# Altium PCB Flash Strobe Board with IGBTs.PcbDoc
Units mil, origin at the board's own origin, x right, y up, seen from the top; angles counter-clockwise.
Board outline 2964.62 x 3200.85 mil, 2 copper layers (Top Layer, Bottom Layer); 44 components, 17 nets, 88 pads, 0 vias.
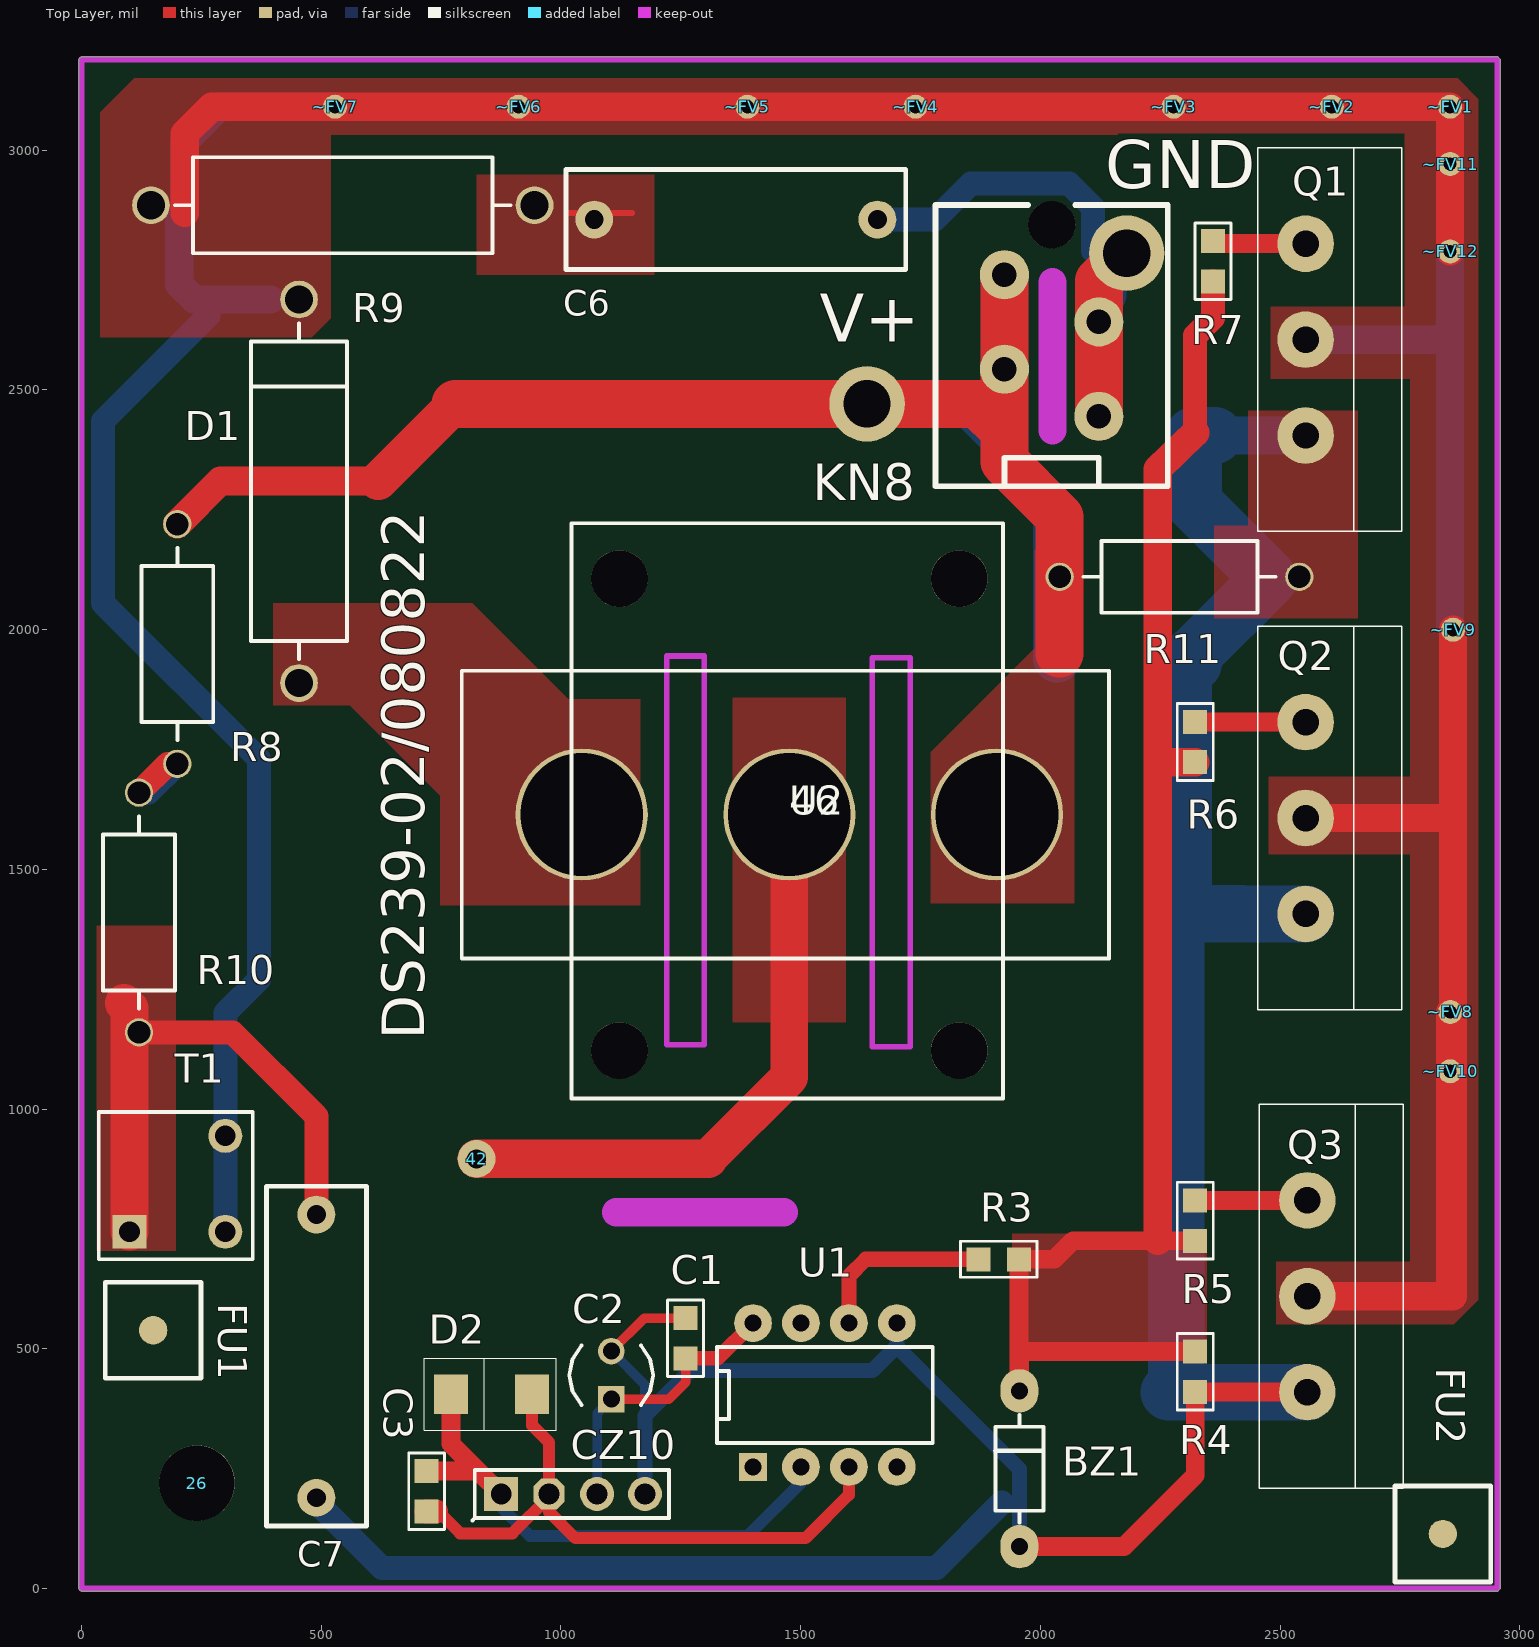
[diagram p0: Top Layer view]
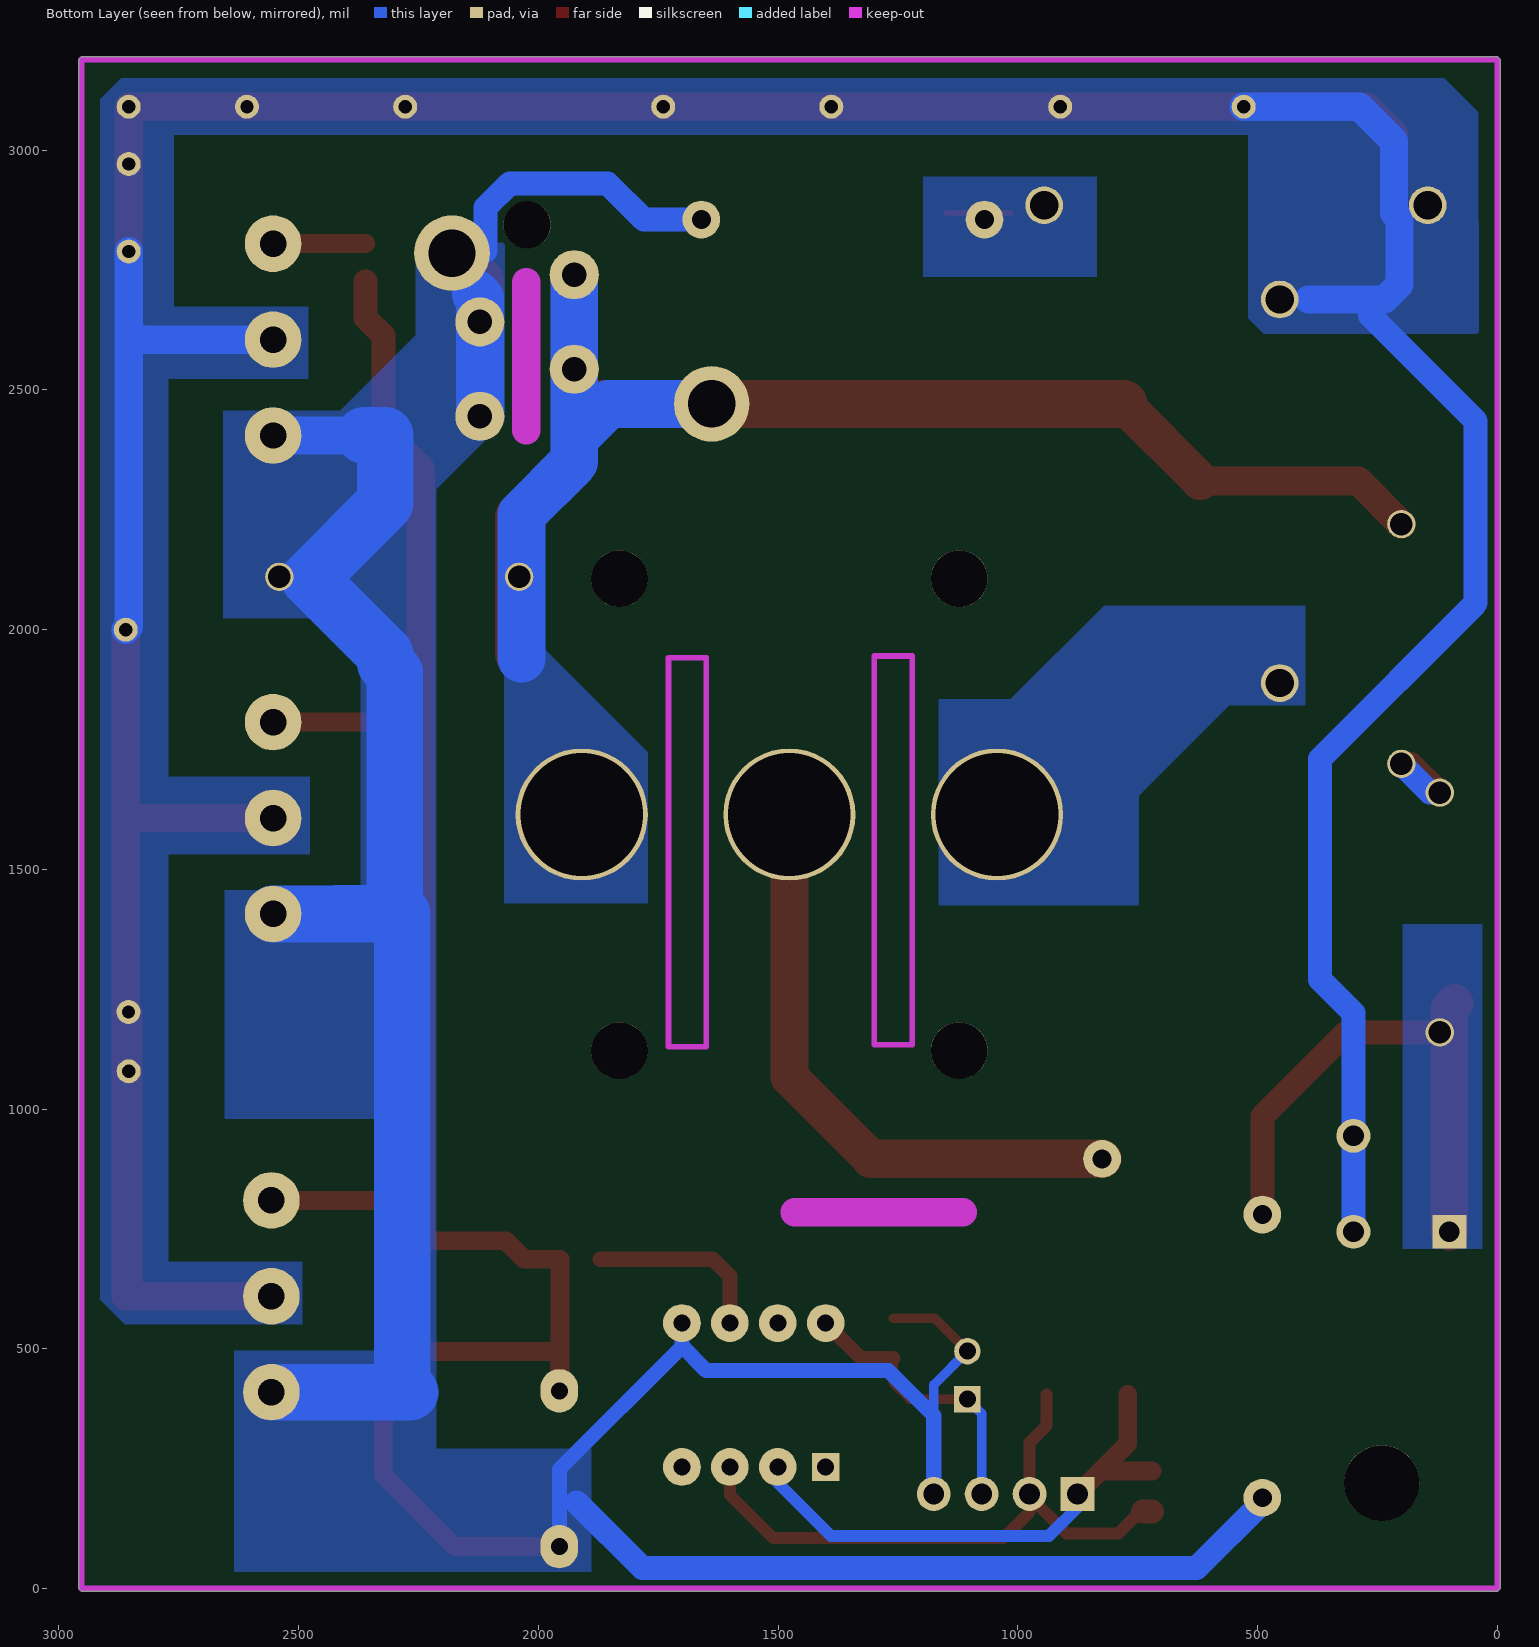
[diagram p1: Bottom Layer view, seen from below]

## Layer stack, top to bottom
Top Solder: solder mask 0.4, Solder Resist, Dk 3.5
Top Layer: signal copper 1.4
Dielectric 1: dielectric 12.6, FR-4, Dk 4.8
Bottom Layer: signal copper 1.4
Bottom Solder: solder mask 0.4, Solder Resist, Dk 3.5

## Board outline
-5.91,0 0,-5.91 2952.81,-5.91 2958.72,0 2958.72,3189.04 2952.81,3194.94 0,3194.94 -5.91,3189.04

## Design rules (kind name [scope] priority, off if disabled: settings)
Clearance Clearance_2 [OnLayer('Bottom Layer') And (IsThruPin Or IsSMTPin Or IsWire) vs OnLayer('Bottom Layer') And (IsThruPin Or IsSMTPin Or IsWire Or IsVia)] p1: gap=11.81 ignorepadtopadclearanceinfootprint=FALSE
Clearance Clearance_1 [OnLayer('Top Layer') And (IsThruPin Or IsSMTPin Or IsWire Or IsVia) vs OnLayer('Top Layer') And (IsThruPin Or IsSMTPin Or IsWire Or IsVia)] p2: gap=11.81 ignorepadtopadclearanceinfootprint=FALSE
Clearance [All] p3: gap=12 ignorepadtopadclearanceinfootprint=FALSE
ComponentClearance [All] p1: gap=0 collisioncheckmode=3 verticalgap=0 showdistances=FALSE
PlaneConnect [All] p1: planeconnectstyle=Relief reliefexpansion=25 reliefentries=4 reliefconductorwidth=12 reliefairgap=10
PolygonConnect [All] p1: connectstyle=Direct reliefconductorwidth=10 reliefentries=4 polygonreliefangle="90 Angle" airgapwidth=10
RoutingVias [All] p1: holewidth=28 width=50 viastyle="Through Hole" minholewidth=28 minwidth=50 maxholewidth=28 maxwidth=50
SolderMaskExpansion [All] p1: expansion=0
Width Net_Width_1 [InNet('NET_16')] p1: maxlimit=0.12 minlimit=0.12 preferedwidth=0.12
Width [All] p2: maxlimit=150 minlimit=12 preferedwidth=12
28 further rules are at their usual default settings.

## Components (designator, comment, footprint, x,y, rotation, side; value= is the part's Value field where it differs from the comment)
26 "" POINT_1 240.99,220.12 r0 top
42 "" VIA_REV1 824.13,896.19 r0 top
46 "" FLASH_SCREW_REV1 1476.38,1613.99 r90 top
BZ1 "1N5249B" BZ19_2 1956.17,87.43 r90 top
C1 "100nF" SMD_C_0805_TOP 1260,480 r90 top
C2 "10uF 25V" 10U_25V 1105,395 r90 top
C3 "100nF" SMD_C_0805_TOP 720,245 r270 top
C6 "47nF X2" "CFR F15 L18 B5.3 H11_Primary" 1660,2855 r180 top
C7 "47nF X2" "CFR F15 L18 B5.3 H11_Primary" 490,780 r270 top
CZ10 "HEADER 4" CONNECTOR_4PINS 875.32,197.28 r0 top
D1 "6A10" 6ADIODE 453.77,1888.44 r90 top
D2 "SMAJ20A" 6JG1_2 940,405 r180 top
FU1 "" FIDUCIAL_TOP 149.64,538.75 r270 top
FU2 "" FIDUCIAL_TOP 2839.34,113.89 r90 top
GND "CONN" POWER_INPUT 2180,2785 r0 top
KN8 "91999_0454" 91999_2_91999_0454(Primary) 1925,2740 r0 top
Q1 "G160N60" G160N60 2553.09,2804.7 r270 top
Q2 "G160N60" G160N60 2553.09,1806.93 r270 top
Q3 "G160N60" G160N60 2556.63,809.57 r270 top
R3 "20ohm" SMD_R_0805_TOP 1871.12,686.72 r0 top
R4 "10kohm" SMD_R_0805_TOP 2322.83,410.3 r90 top
R5 "51ohm" SMD_R_0805_TOP 2322.83,725.3 r90 top
R6 "51ohm" SMD_R_0805_TOP 2322.83,1723.46 r90 top
R7 "51ohm" SMD_R_0805_TOP 2360,2726 r90 top
R8 "0.5W 1Mohm" 0.5W 200,1720 r90 top
R9 "2W 15ohm" 2W 145,2885 r0 top
R10 "0.5W 2.2Mohm" 0.5W 120,1660 r270 top
R11 "0.5W 1Mohm" 0.5W 2540,2110 r180 top
T1 "PFT-1052V" TRIGER_REV2 100.01,944.16 r0 top
U1 "TLP350" TLP350 1400.58,253.59 r0 top
U2 "FLASH LAMP" FLASHER_2_REV1 1476.38,1614.17 r0 top
V+ "CONN" POWER_INPUT 1638.41,2470.8 r0 top
~FV1 "VIA1" VIA1 2854.33,3090.55 r0 top
~FV2 "VIA1" VIA1 2607.63,3090.55 r0 top
~FV3 "VIA1" VIA1 2277.63,3090.55 r0 top
~FV4 "VIA1" VIA1 1739.5,3090.55 r0 top
~FV5 "VIA1" VIA1 1389.01,3090.55 r0 top
~FV6 "VIA1" VIA1 911.5,3090.55 r0 top
~FV7 "VIA1" VIA1 528.88,3090.55 r0 top
~FV8 "VIA1" VIA1 2854.63,1202.5 r0 top
~FV9 "VIA1" VIA1 2860.5,1999.76 r0 top
~FV10 "VIA1" VIA1 2854.33,1078.73 r0 top
~FV11 "VIA1" VIA1 2854.33,2970.88 r0 top
~FV12 "VIA1" VIA1 2854.33,2788.76 r0 top

## Footprints (in the part's own frame and the unit in brackets; to place one, negate y for a bottom-side part, rotate by r counter-clockwise, add the part's x,y. Pads: shape width x height; smd on the part's side, far side on the other; paste and mask are expansions set on the pad)
0.5W [mm]
  round 1.499 / inner round 1.524 / far side round 1.499 hole 1.2: 1(0,0) 2(12.7,0)
  silkscreen extent 1.27,-1.91 11.43,1.91
2W [mm]
  round 2 / inner round 1.524 / far side round 2 hole 1.5: 1(0,0) 2(20.32,0)
  silkscreen extent 1.27,-2.54 19.05,2.54
6ADIODE [mm]
  round 2 / inner round 1.524 / far side round 2 hole 1.5: 1(0,0) 2(20.32,0)
  silkscreen extent 1.27,-2.54 19.05,2.54
6JG1_2 [mm]
  rect 1.8x2.1 smd: 1(0,0) 2(4.3,0)
  silkscreen extent -1.27,-1.91 5.71,1.91
10U_25V [mil]
  rect 55.1x55.1 / inner round 60 / far side rect 55.1x55.1 hole 35.4: 1(0,0)
  round 55.1 / inner round 60 / far side round 55.1 hole 35.4: 2(100,0)
  silkscreen extent -12,-88 112,88
91999_2_91999_0454(Primary) [mm]
  round 2.5 hole 2.5: 5(2.5,2.65)
  round 2.6 hole 1.3: a1(0,0) a2(5,-2.5) b1(0,-5) b2(5,-7.5)
  silkscreen extent -3.65,-11.2 8.65,3.7
BZ19_2 [mil]
  oval 90.53x78.73 / inner round 60 / far side oval 90.53x78.73 hole 35.4 mask-26.73: 1(0,0) 2(325,0)
  silkscreen extent 50,-50 275,50
"CFR F15 L18 B5.3 H11_Primary" [mm]
  round 2 hole 1: 1(0,0) 2(15,0)
  silkscreen extent -1.5,-2.65 16.5,2.65
CONNECTOR_4PINS [mm]
  rect 1.799x1.799 / inner round 1.524 / far side rect 1.799x1.799 hole 1.1: 1(0,0)
  oct 1.651x1.651 / inner round 1.524 / far side round 1.799 hole 1.1: 2(2.54,0)
  round 1.799 hole 1.1: 3(5.08,0)
  round 1.799 / inner round 1.524 / far side round 1.799 hole 1.1: 4(7.62,0)
  silkscreen extent -1.52,-1.4 8.89,1.27
FIDUCIAL_TOP [mil]
  round 59.03 smd: 1(0,0)
  silkscreen extent -100,-100 100,100
FLASH_SCREW_REV1 [mm]
  round 3 / inner round 1.524 / far side round 3 hole 3 mask+0: 1(-12.5,9) 2(12.5,9) 3(-12.5,-9) 4(12.5,-9)
  silkscreen extent -15.04,-11.32 15.44,11.54
FLASHER_2_REV1 [mm]
  round 7 / inner round 1.524 / far side round 7 hole 6.5: 1(-11,0) 2(10.999,0) 3(0,0)
  silkscreen extent -17.35,-7.62 16.94,7.62
G160N60 [mm]
  round 3 / inner round 1.524 / far side round 3 hole 1.4: 1(0,0) 2(5.08,0) 3(10.16,0)
  silkscreen extent -5.08,-2.54 15.24,5.08
POINT_1 [mil]
  round 157.47 / inner round 60 / far side round 157.47 hole 157.47 mask-157.47: 1(0,0)
POWER_INPUT [mm]
  round 4 / inner round 1.524 / far side round 4 hole 2.5: 1(0,0)
SMD_C_0805_TOP [mil]
  rect 50x50 smd: 1(0,0) 2(84,0)
  silkscreen extent -38,-38 122,38
SMD_R_0805_TOP [mil]
  rect 50x50 smd: 1(0,0) 2(84,0)
  silkscreen extent -38,-38 122,38
TLP350 [mil]
  rect 58x58 / inner round 60 / far side rect 58x58 hole 35.4: 1(0,0)
  round 78.73 / inner round 60 / far side round 78.73 hole 35.4: 2(100,0) 3(200,0) 4(300,0) 5(300,300) 6(200,300) 7(100,300) 8(0,300)
  silkscreen extent -75,50 375,250
TRIGER_REV2 [mm]
  rect 1.799x1.799 / inner round 1.524 / far side rect 1.799x1.799 hole 1.1: 1(0,-5.08)
  round 1.799 / inner round 1.524 / far side round 1.799 hole 1.1: 2(5.08,0) 3(5.08,-5.08)
  silkscreen extent -1.62,-6.54 6.53,1.27
VIA1 [mm]
  round 1.27 / inner round 1.524 / far side round 1.27 hole 0.7 mask+0.127: FV(0,0)
VIA_REV1 [mm]
  round 2 / inner round 1.524 / far side round 2 hole 1: 3(0,0)

## Part data
C6 C7: "Capacitor"
KN8: "PIN HEADER 5mm 2'LI DIK 16A 91999_0454"

## Nets (pads, with @x,y where several pads share a name; then routed paths per layer and width w, separated by ;. In a path a pad name is that pad's centre, name@x,y a point inside that pad or via, vN(x,y) a via of type N, cw(c..) or ccw(c..) an arc to the next point about the centre after c; other vN are vias at no path point)
0: BZ1.1 C1.2 C2.2 C6.1 C7.2 CZ10.4 GND.1 KN8.a2 KN8.b2 Q1.3 Q2.3 Q3.3 R4.1 R11.1 U1.5 | length 8448.3
  Top Layer w20: C2.2 1174,564 C1.2
  Top Layer w39.37: BZ1.1 2174.03,87.43 2322.83,236.24 R4.1 2555.9,410.3 Q3.3
  Top Layer w100: KN8.b2 KN8.a2 2121.85,2726.85 GND.1
  Bottom Layer w20: C2.2 1175.32,424.68 1175.32,360.32
  Bottom Layer w31.5: CZ10.4 1175.32,360.32 1270,455 1650,455 1700.58,505.58 ; U1.5 1700.58,505.58 ; BZ1.1 1956.17,248.83 1700.58,504.42 1700.58,505.58
  Bottom Layer w50: C7.2@490,180 627.09,42.91 1782.91,42.91 1920,180 ; C6.1 1780,2855 1855.54,2930.54 2059.46,2930.54 2110,2880 GND.1@2110,2790
  Bottom Layer w78.74: 2362.98,2404.7 Q1.3
  Bottom Layer w100: KN8.b2 KN8.a2 2121.85,2691.85 2130,2700
  Bottom Layer w118.11: 2362.98,2404.7 2319.2,2404.7 2319.2,2264.47 2477.49,2106.18 2319.2,1947.9 2319.2,1929.44 2299.2,1909.43 2299.2,1409.44 Q2.3 2283.45,1406.93 2283.45,425.19 2267.58,409.57 Q3.3
+15V: C1.1 C2.1 CZ10.3 U1.8 | length 600.6
  Top Layer w20: C2.1 1225,395 1260,430 C1.1
  Top Layer w30: C1.1 1326.99,480 U1.8
  Bottom Layer w20: CZ10.3 1075.32,365.32 C2.1
N00106: D1.2 Q1.2 Q2.2 Q3.2 R9.1 T1.2 T1.3 ~FV1.FV ~FV2.FV ~FV3.FV ~FV4.FV ~FV5.FV ~FV6.FV ~FV7.FV ~FV8.FV ~FV9.FV ~FV10.FV ~FV11.FV ~FV12.FV | length 9841
  Top Layer w59.06: 215.4,2868.88 215.4,3034.27 271.67,3090.55 ~FV7.FV ~FV6.FV ~FV5.FV ~FV4.FV 2023.5,3090.55 ~FV3.FV ~FV2.FV ~FV1.FV ~FV11.FV ~FV12.FV ; Q2.2 2860.5,1606.93 ; Q3.2 2854.63,609.57 ; ~FV10.FV ~FV10.FV@2854.63,1079.03 ; ~FV8.FV ~FV10.FV@2854.63,1079.03 ; ~FV9.FV 2860.5,1606.93 ; 2854.63,609.57 ~FV10.FV@2854.63,1079.03 ; 2854.63,609.57 2860.5,609.57 2860.5,1606.93
  Bottom Layer w50: 265,2655 45,2435 45,2055 370,1730 370,1270 300.01,1200.01 T1.2 T1.3
  Bottom Layer w59.06: 393.77,2688.44 235.48,2688.44 203.98,2719.94 203.98,2857.46 215.4,2868.88 215.4,3018.57 287.38,3090.55 ~FV7.FV ; Q1.2 2833.04,2604.7 2854.33,2625.99 ; ~FV12.FV 2854.33,2625.99 ; ~FV9.FV 2854.33,2005.93 2854.33,2625.99
N00107: R8.1 R10.1 | length 209.7
  Top Layer w50: R10.1 180,1720 R8.1
  Bottom Layer w50: R10.1 140,1660 R8.1
N00521: Q1.1 R7.2 | length 193.1
  Top Layer w39.37: R7.2@2360,2804.83 Q1.1@2552.96,2804.83
  Top Layer w59.06: Q1.1@2552.96,2804.83 Q1.1
N00713: Q3.1 R5.2 | length 233.9
  Top Layer w39.37: R5.2 2323.1,809.57 Q3.1
N00766: Q2.1 R6.2 | length 230.5
  Top Layer w39.37: R6.2 2323.36,1806.93 Q2.1
N00808: BZ1.2 R3.2 R4.2 R5.1 R6.1 R7.1 | length 3217.2
  Top Layer w39.37: 2228.33,725.3 2067.81,725.3 2029.23,686.72 R3.2 1955.12,413.48 BZ1.2 1956.17,494.3 R4.2 ; 2245,725.3 R5.1
  Top Layer w50: 2322.83,2410.55 2322.83,2612.83 2360,2650 R7.1
  Top Layer w59.06: 2245,725.3 2245,1723.46 ; R6.1 2245,1723.46 ; 2322.83,2410.55 2245,2335.05 2245,1723.46
N01961: C3.1 CZ10.1 D2.2 U1.2 | length 1115.9
  Top Layer w39.37: C3.1 827.61,245 ; D2.2 770.72,301.89 827.61,245 ; CZ10.1 827.61,245
  Bottom Layer w25: CZ10.1 875.32,169.68 935,110 1390,110 1500.58,220.58 U1.2 U1.2@1500.58,254.42
N02002: C3.2 CZ10.2 D2.1 U1.3 | length 1309.6
  Top Layer w25: C3.2@739,161 744,161 790,115 898.52,115 CZ10.2@975.32,191.8 ; D2.1 940,340 975.32,304.68 CZ10.2 CZ10.2@975.32,191.8 ; U1.3 1600.58,195.58 1510,105 1030,105 975.32,159.68 CZ10.2@975.32,191.8
  Top Layer w50: C3.2 C3.2@739,161
N04820: R3.1 U1.6 | length 383.2
  Top Layer w31.5: U1.6 1600.58,651.77 1635.53,686.72 R3.1
N09329: C6.2 R9.2 | length 133.3
  Top Layer w12: 1015.4,2868.88 1148.67,2868.88
N10937: D1.1 U2.1
N13384: C7.1 R10.2 T1.1 | length 1129.5
  Top Layer w50: R10.2 315,1160 490,985 C7.1
  Top Layer w78.74: 89.4,1220.7 89,1221.1 100.01,1210.09 T1.1
N17422: 
NET_16: 42.3 U2.3 | length 1271.1
  Top Layer w78.74: 1307.08,896.19 1307.08,897.63 1476.38,1066.93 U2.3
  Top Layer w80: 42.3 1307.08,896.19
POWER_VCC_RED(V+): KN8.a1 KN8.b1 R8.2 R11.2 U2.2 V+.1 | length 3981.7
  Top Layer w12: U2.2 1984.25,1614.17 U2.2@2023.61,1653.53
  Top Layer w60: R8.2 290,2310 619.2,2310
  Top Layer w80: 619.2,2310 780,2470.8
  Top Layer w100: 780,2470.8 V+.1 1869.2,2470.8 1925,2415 ; KN8.a1 KN8.b1 1925,2415 ; 2040,1950 2040,2235 1925,2350 1925,2415
  Bottom Layer w100: V+.1 1853.93,2470.8 1925,2399.72 ; KN8.a1 KN8.b1 1925,2399.72 ; 2035,1940 2035,2240 1925,2350 1925,2399.72
pads on no net: 26.1 46.1 46.2 46.3 46.4 FU1.1 FU2.1 KN8.5 U1.1 U1.4 U1.7

## Polygon pours and split planes (outlines as drawn)
N00808 on Top Layer "283" (solid, pour order 12): 1940.93,740.15 1940.93,480.31 2346.44,480.31 2346.44,740.15
POWER_VCC_RED(V+) on Top Layer "348" (solid, pour order 19): 1988.17,2165 2070.85,2165 2070.85,1429.12 1771.64,1429.12 1771.64,1744.08 1988.17,1960.62
N13384 on Top Layer "337" (solid, pour order 16): 196.85,1078.73 196.85,704.72 31.5,704.72 31.5,1381.88 196.85,1381.88
N10937 on Top Layer "344" (solid, pour order 17): 1165.35,1425 748.03,1425 748.03,1653.53 559.05,1842.51 400,1842.51 400,2055 815.06,2055 1015.74,1854.32 1165.35,1854.32
NET_16 on Top Layer "321" (solid, pour order 14): 1358.26,1858.25 1594.48,1858.25 1594.48,1181.09 1358.26,1181.09
0 on Top Layer "289" (solid, pour order 13): 2661.4,2244.08 2661.4,2023.61 2362.19,2023.61 2362.19,2216.52 2433.05,2216.52 2433.05,2456.68 2661.4,2456.68
N09329 on Top Layer "273" (solid, pour order 11): 1195,2740 824.92,2740 824.92,2948.66 1195,2948.66
N00106 on Top Layer "326" (solid, pour order 9): 39.37,3078.72 39.37,2610 480,2610 519.68,2649.68 519.68,3031.47 1901.56,3031.47 2161.4,3031.47 2161.4,3035.41 2759.82,3035.41 2759.82,2673.21 2480.3,2673.21 2480.3,2523.6 2771.63,2523.6 2771.63,1692.9 2476.36,1692.9 2476.36,1531.48 2771.63,1531.48 2771.63,681.1 2492.11,681.1 2492.11,551.18 2862.18,551.18 2913.36,602.36 2913.36,3106.28 2870.06,3149.58 110.24,3149.58
0 on Bottom Layer "267" (solid, pour order 4): 1890,35.43 2633.84,35.43 2633.84,496.06 2334.63,496.06 2334.63,980.31 2653.52,980.31 2653.52,1456.68 2370.06,1456.68 2370.06,1976.36 2425.18,2031.48 2425.18,2023.61 2657.46,2023.61 2657.46,2456.68 2413.37,2456.68 2255.89,2614.15 2255.89,2807.07 2070,2807.07 2070,2435 2212.58,2292.42 2212.58,291.34 1890,291.34
N00106 on Bottom Layer "332" (solid, pour order 7): 39.37,3078.72 39.14,2617 487,2617 519.68,2649.68 519.68,3031.47 2165,3031.47 2759.82,3031.47 2759.82,2673.21 2480.3,2673.21 2480.3,2523.6 2771.63,2523.6 2771.63,1692.9 2476.36,1692.9 2476.36,1531.48 2771.63,1531.48 2771.63,681.1 2492.11,681.1 2492.11,551.18 2862.18,551.18 2913.36,602.36 2913.36,3106.28 2870.06,3149.58 110.24,3149.58
POWER_VCC_RED(V+) on Bottom Layer "347" (solid, pour order 8): 1988.17,2170 2070.85,2170 2070.85,1429.12 1771.64,1429.12 1771.64,1744.08 1988.17,1960.62
N09329 on Bottom Layer "314" (solid, pour order 6): 1197.2,2735.67 1197.2,2944.33 835,2944.33 835,2735.67
N13384 on Bottom Layer "271" (solid, pour order 5): 196.85,1082.67 196.85,1385.82 31.5,1385.82 31.5,708.66 196.85,708.66
N10937 on Bottom Layer "329" (solid, pour order 2): 1165.35,1425 1165.35,1854.32 1015.74,1854.32 820.06,2050 400,2050 400,1842.51 559.05,1842.51 748.03,1653.53 748.03,1425
no net on Top Solder "343" (solid, pour order 0): 1165.35,1425 1165.35,1854.32 1015.74,1854.32 820.06,2050 405,2050 405,1842.51 559.05,1842.51 748.03,1653.53 748.03,1425
POWER_VCC_RED(V+) on Top Solder "338" (solid, pour order 0): 1992.11,2160 2074.79,2160 2074.79,1429.12 1775.58,1429.12 1775.58,1744.08 1992.11,1960.62
no net on Top Solder "322" (solid, pour order 0): 1358.26,1858.25 1594.48,1858.25 1594.48,1181.09 1358.26,1181.09
no net on Top Solder "319" (solid, pour order 0): 1195,2740 824.92,2740 824.92,2948.66 1195,2948.66
no net on Top Solder "327" (solid, pour order 0): 2492.11,681.1 2492.11,551.18 2862.18,551.18 2913.36,602.36 2913.36,3106.28 2870.06,3149.58 110.24,3149.58 39.37,3078.72 39.37,2616 476,2616 519.68,2659.68 519.68,3031.47 1901.56,3031.47 2161.4,3031.47 2161.4,3035.41 2759.82,3035.41 2759.82,2673.21 2480.3,2673.21 2480.3,2523.6 2771.63,2523.6 2771.63,1692.9 2476.36,1692.9 2476.36,1531.48 2771.63,1531.48 2771.63,681.1
POWER_VCC_RED(V+) on Bottom Solder "349" (solid, pour order 0): 1988.17,2165 2070.85,2165 2070.85,1429.12 1771.64,1429.12 1771.64,1744.08 1988.17,1960.62
no net on Bottom Solder "345" (solid, pour order 0): 1165.35,1430 1165.35,1854.32 1015.74,1854.32 821.06,2049 410,2049 410,1842.51 559.05,1842.51 748.03,1653.53 748.03,1430
no net on Bottom Solder "333" (solid, pour order 0): 2492.11,681.1 2492.11,551.18 2862.18,551.18 2913.36,602.36 2913.36,3106.28 2870.06,3149.58 110.24,3149.58 39.37,3078.72 39.37,2614 474,2614 519.68,2659.68 519.68,3031.47 1901.56,3031.47 2161.4,3031.47 2759.82,3031.47 2759.82,2673.21 2480.3,2673.21 2480.3,2523.6 2771.63,2523.6 2771.63,1692.9 2476.36,1692.9 2476.36,1531.48 2771.63,1531.48 2771.63,681.1
no net on Bottom Solder "320" (solid, pour order 0): 1200,2740 825.99,2740 825.99,2948.66 1200,2948.66

## Keep-outs
Keep-Out Layer:
  lines w11.81: 0,0 0,3189.04 2952.81,3189.04 2952.81,0 0,0 ; 1220.46,1133.85 1299.2,1133.85 1299.2,1944.87 1220.46,1944.87 1220.46,1133.85 ; 1649.59,1129.91 1728.33,1129.91 1728.33,1940.93 1649.59,1940.93 1649.59,1129.91
  lines w59.06: 1115,785 1465,785 ; 2025,2415 2025,2725

## Silkscreen, mask and mechanical layers (free items; w line width, h text height)
Top Overlay:
  text "DS239-02/080822" at 715,1145 h88.58 r90
Drill Drawing:
  lines w10: 45,-4380 3780,-4380 ; 45,-4375 45,-1825 ; 45,-1820 3780,-1820 ; 50,-4175 3775,-4175 ; 50,-4025 3775,-4025 ; 50,-3875 3775,-3875 ; 50,-3725 3775,-3725 ; 50,-3575 3775,-3575 ; 50,-3425 3775,-3425 ; 50,-3275 3775,-3275 ; 50,-3125 3775,-3125 ; 50,-2975 3775,-2975 ; 50,-2825 3775,-2825 ; 50,-2675 3775,-2675 ; 50,-2525 3775,-2525 ; 50,-2375 3775,-2375 ; 50,-2225 3775,-2225 ; 50,-2220 3775,-2220 ; 50,-2025 3775,-2025 ; 50,-2020 3775,-2020 ; 182.5,-3100 282.5,-3000 ; 182.5,-3000 282.5,-3100 ; 182.5,-2750 282.5,-2750 ; 207.5,-3800 257.5,-3800 ; 207.5,-3225 257.5,-3175 ; 207.5,-3175 257.5,-3225 ; 207.5,-2450 257.5,-2450 ; 217.5,-4105 227.5,-4115 237.5,-4115 247.5,-4105 ; 222.5,-2900 242.5,-2900 ; 232.5,-3825 232.5,-3775 ; 232.5,-2910 232.5,-2890 ; 232.5,-2800 232.5,-2700 ; 232.5,-2475 232.5,-2425 ; 415,-4175 415,-2025 ; 420,-4175 420,-2025 ; 1259.17,-4175 1259.17,-2025 ; 2065.83,-4375 2065.83,-2025 ; 2620.83,-4375 2620.83,-2025 ; 3780,-4375 3780,-1825 ; 207.5,-3525 207.5,-3475 ; 207.5,-3525 257.5,-3525 ; 207.5,-3525 257.5,-3475 ; 207.5,-3475 257.5,-3475 ; 207.5,-3475 257.5,-3525 ; 257.5,-3525 257.5,-3475 ; 50,-4375 3775,-4375 3775,-1825 50,-1825 50,-4375 ; 182.5,-2900 232.5,-2850 282.5,-2900 232.5,-2950 182.5,-2900 ; 207.5,-4110 207.5,-4090 222.5,-4075 242.5,-4075 257.5,-4090 257.5,-4110 242.5,-4125 222.5,-4125 207.5,-4110 ; 207.5,-3960 232.5,-3935 257.5,-3960 207.5,-3960 ; 207.5,-3825 207.5,-3775 257.5,-3775 257.5,-3825 207.5,-3825 ; 207.5,-3650 232.5,-3625 257.5,-3650 232.5,-3675 207.5,-3650 ; 207.5,-3350 207.5,-3325 232.5,-3325 232.5,-3375 257.5,-3375 257.5,-3350 207.5,-3350 ; 207.5,-2610 207.5,-2590 232.5,-2615 257.5,-2590 257.5,-2610 232.5,-2585 207.5,-2610 ; 207.5,-2310 207.5,-2290 222.5,-2275 242.5,-2275 257.5,-2290 257.5,-2310 242.5,-2325 222.5,-2325 207.5,-2310 ; 222.5,-4090 227.5,-4090 227.5,-4085 222.5,-4085 222.5,-4090 ; 237.5,-4090 237.5,-4085 242.5,-4085 242.5,-4090 237.5,-4090
  text ".Legend" at 50,-1825 h60

## Text inside footprints (layer, text, board x,y; h text height)
C1: Mechanical 2 "SMD_C_0805_TOP" at 1260,480 h0.21 r90
C3: Mechanical 2 "SMD_C_0805_TOP" at 720,245 h0.21 r270
R3: Mechanical 2 "SMD_R_0805_TOP" at 1871.12,686.72 h0.21
R4: Mechanical 2 "SMD_R_0805_TOP" at 2322.83,410.3 h0.21 r90
R5: Mechanical 2 "SMD_R_0805_TOP" at 2322.83,725.3 h0.21 r90
R6: Mechanical 2 "SMD_R_0805_TOP" at 2322.83,1723.46 h0.21 r90
R7: Mechanical 2 "SMD_R_0805_TOP" at 2360,2726 h0.21 r90
R8: Mechanical 2 "0.5W" at 200,1720 h0.21 r90
R10: Mechanical 2 "0.5W" at 120,1660 h0.21 r270
R11: Mechanical 2 "0.5W" at 2540,2110 h0.21 r180